# EAGLE board rgb3-panelized2 (EAGLE 7.5.0)
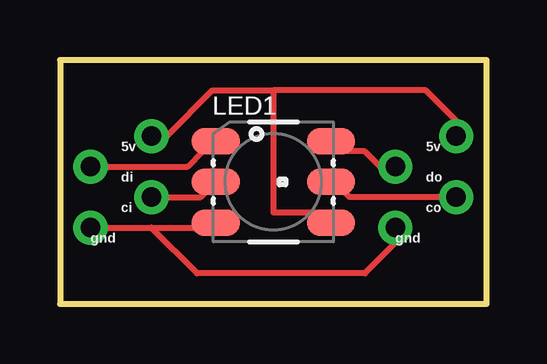
[diagram p0: board, top side]
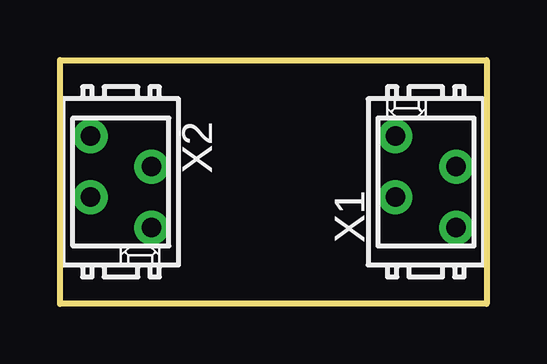
[diagram p1: board, bottom side, seen from below]

Size 17.78 x 10.16 mm. Coordinates in mm from the lower left corner, seen from the top.
Outline: 0,10.16 0,0 17.78,0 17.78,10.16 0,10.16
Copper layers (1*16): Top 0.035mm / dielectric 1.5mm / Bottom 0.035mm
Design rules "SparkFun": minimum track width 8mil, minimum drill 20mil, track to track 8mil, track to pad 8mil, pad to pad 8mil, via to via 8mil, smd to smd 8mil, copper to edge 10mil, drill to drill 8mil, minimum pad ring 12mil, minimum via ring 10mil, stop-mask expansion 4mil, vias tented up to drill 25mil, thermal gap 10mil

## Footprints (pad centres in the part's own frame; a part is rotated, then mirrored left to right if it is on the bottom)
LED-TRICOLOR-5050 = smd 2 x 1.1: 1 -2.4,1.7; 2 -2.4,0; 3 -2.4,-1.7; 4 2.4,-1.7; 5 2.4,0; 6 2.4,1.7
MICROMATCH-4 = drill 0.813: 1 1.905,1.27; 2 0.635,-1.27; 3 -0.635,1.27; 4 -1.905,-1.27

## Placement (x,y rotation side)
LED1  LED-TRICOLOR-5050NO_IC  [LED-TRICOLOR-5050]  8.89,5.08 0 top
X1  MICROMATCH-4  [MICROMATCH-4]  2.54,5.08 90 bottom
X2  MICROMATCH-4  [MICROMATCH-4]  15.24,5.08 270 bottom

## Library data of the parts
LED1 = SparkFun-LED
X1 X2 = con-amp-micromatch; MPN: 7-215464-4; OC_FARNELL: 3784629; OC_NEWARK: 19R8124

## Nets
N$1: LED1.4 X1.1 X2.4
N$2: LED1.1 X1.2
N$3: LED1.2 X1.3
N$4: LED1.3 X1.4 X2.1
N$5: LED1.5 X2.2
N$6: LED1.6 X2.3

## Tracks (layer width: path | path; a pad name or v marks a point on that pad's centre or on a via)
N$1
  Top 0.254: X1.1 4.45,6.99 6.35,8.89 8.89,8.89 | 8.89,8.89 8.89,3.81 10.86,3.81 LED1.4 | X2.4 16.51,7.62 15.24,8.89 8.89,8.89
N$2
  Top 0.254: LED1.1 6.13,6.42 arc-45 5.96,6.35 5.32,5.71 X1.2
N$3
  Top 0.254: X1.3 5.86,4.45 LED1.2
N$4
  Top 0.254: X1.4 3.81,3.17 | 3.81,3.17 6.29,3.17 LED1.3 6.35,3.24 | X2.1 13.97,2.54 12.7,1.27 5.71,1.27 3.81,3.17
N$5
  Top 0.254: X2.2 12.06,4.45 11.43,5.08 LED1.5
N$6
  Top 0.254: X2.3 13.34,5.71 12.7,6.35 11.72,6.35 LED1.6

## Text on the board
tPlace: 5v | 5v | di | do | ci | co | gnd | gnd
_tNames: LED1
_bNames: X2 | X1